# Altium PCB STM32F103ZET6.PCBDOC (part 3 of 4)
Units mil, origin at the board's own origin, x right, y up, seen from the top; angles counter-clockwise.
Board outline 4000 x 2280 mil, 2 copper layers (Top Layer, Bottom Layer); 80 components, 152 nets, 495 pads, 75 vias.
Unrouted connection lines stored in the file: 4.
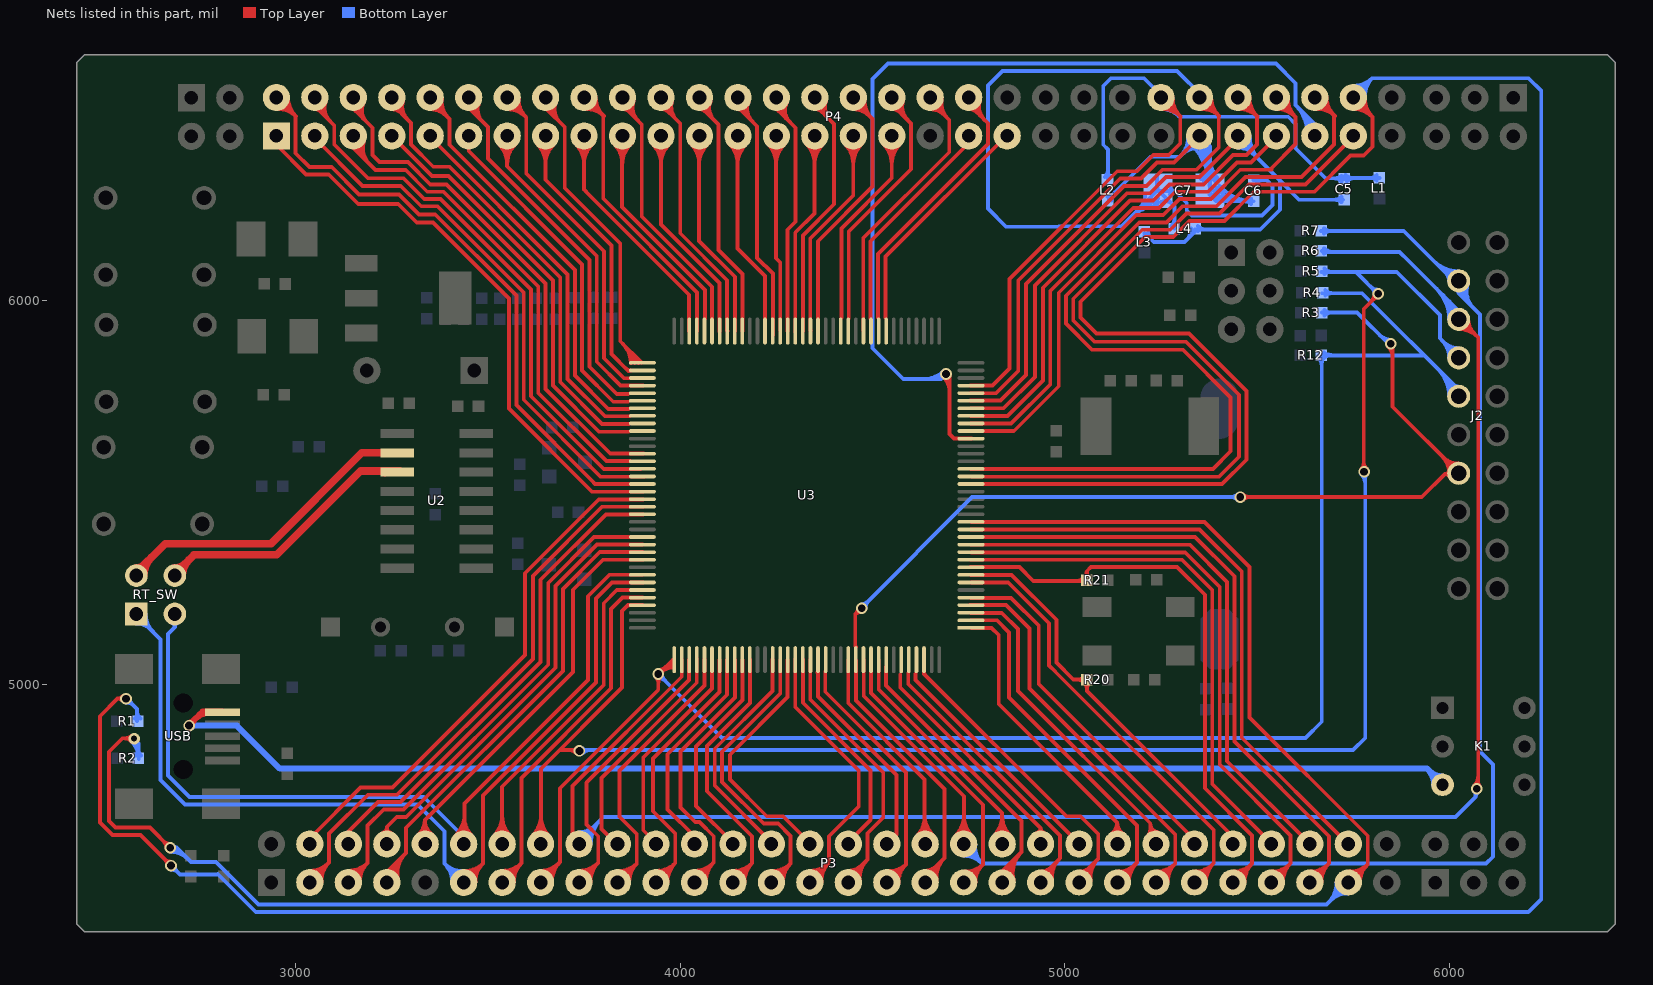
[diagram p3: the nets of this part, all layers, seen from the top]

## Via types
v1: diameter 30, hole 20, Top Layer to Bottom Layer, 68 vias
v2: diameter 125.98, hole 118.11, Top Layer to Bottom Layer, 4 vias
v3: diameter 23.62, hole 15.75, Top Layer to Bottom Layer, 2 vias
v4: diameter 30, hole 15, Top Layer to Bottom Layer, 1 vias

## Nets (pads, with @x,y where several pads share a name; then routed paths per layer and width w, separated by ;. In a path a pad name is that pad's centre, name@x,y a point inside that pad or via, vN(x,y) a via of type N, cw(c..) or ccw(c..) an arc to the next point about the centre after c; other vN are vias at no path point) (continued)
PA9: P3.12 RT_SW.3 U3.101 | length 2444.2
  Top Layer w10: P3.12@3415.48,4607.52 ccw(c3358.7,4664.3) 3439,4664.3 ; P3.12@3422.55,4600.45 ccw(c3382.84,4640.16) 3439,4640.16 ; P3.12@3439,4586 3439,4691.12 3760,5012.12 3760,5230 3816,5286 U3.101@3902,5286 ; 3439,4630.5 ccw(c3481.5,4630.5) P3.12@3451.45,4600.45 ; 3439,4654.64 ccw(c3505.64,4654.64) P3.12@3458.52,4607.52
  Bottom Layer w10: RT_SW.3@2678.26,5160.72 cw(c2674.7,5150) 2686,5150 ; RT_SW.3@2686,5184 2686,5150 ; RT_SW.3@2693.74,5160.72 ccw(c2697.3,5150) 2686,5150 ; P3.12@3437,4586 3437,4604 3333,4708 2723.87,4708 2667.84,4764.03 2667.84,5131.84 2686,5150
PA10: P3.11 RT_SW.1 U3.102 | length 2943.7
  Top Layer w10: P3.11@3435,4483 3487,4535 ; P3.11@3438.06,4506.41 ccw(c3440.31,4549.89) 3471.1,4519.1 ; P3.11@3438.57,4516.39 ccw(c3441.87,4580.12) 3487,4535 ; P3.11@3457.43,4486.36 cw(c3501.54,4487.15) 3470.35,4518.35 ; P3.11@3467.43,4486.54 cw(c3534.27,4487.73) 3487,4535 ; U3.102@3903,5266 3823,5266 3781,5224 3781,5006.19 3487,4712.19 3487,4535
  Bottom Layer w10: RT_SW.1@2585,5182 2648.84,5118.16 2648.84,4752.16 2712,4689 3317,4689 3387,4619 3387,4535 P3.11@3438,4484 ; RT_SW.1@2586,5159.47 cw(c2586,5107.5) 2622.75,5144.25 ; RT_SW.1@2586,5169.47 cw(c2586,5141.64) RT_SW.1@2605.68,5161.32 ; RT_SW.1@2600.53,5184 ccw(c2642.84,5184) 2612.92,5154.08 ; RT_SW.1@2610.53,5184 ccw(c2676.98,5184) 2629.99,5137.01 ; 3403.24,4518.76 ccw(c3433.27,4548.8) P3.11@3435.79,4506.4 ; 3403.99,4518.01 cw(c3373.56,4487.59) P3.11@3416.57,4486.51 ; P3.11@3406.58,4486.76 ccw(c3341.41,4488.4) 3387.5,4534.5 ccw(c3431.51,4578.5) P3.11@3435.2,4516.38
  Bottom Layer w20: RT_SW.1@2583,5171 RT_SW.1@2583,5182
PA11: P3.14 U3.103 | length 1044.3
  Top Layer w10: P3.14@3515.48,4607.52 ccw(c3463.53,4659.47) 3537,4659.47 ccw(c3610.47,4659.47) P3.14@3558.52,4607.52 ; P3.14@3522.55,4600.45 ccw(c3487.67,4635.33) 3537,4635.33 ccw(c3586.33,4635.33) P3.14@3551.45,4600.45 ; P3.14@3537,4587 3537,4735 3801,4999 3801,5212 3835,5246 U3.103@3904,5246
PA12: P3.13 U3.104 | length 1107.3
  Top Layer w10: P3.13@3535,4484 3587,4536 ; P3.13@3537.56,4506.43 ccw(c3538.8,4551.34) 3570.57,4519.57 ccw(c3602.34,4487.8) P3.13@3557.43,4486.56 ; P3.13@3537.84,4516.42 ccw(c3539.68,4583.32) 3587,4536 ; P3.13@3567.42,4486.84 cw(c3634.32,4488.68) 3587,4536 ; U3.104@3902,5227 3850,5227 3820,5197 3820,4991.02 3587,4758.02 3587,4536
PA13: J2.7 P3.16 R5.1 U3.105 | length 5267.9
  Top Layer w10: P3.16@3615.48,4607.52 ccw(c3561.11,4661.89) 3638,4661.89 ; P3.16@3622.55,4600.45 ccw(c3585.26,4637.74) 3638,4637.74 ; P3.16@3638,4586 3638,4781.75 3849,4992.75 3849,5192 3864,5207 U3.105@3902,5207 ; 3638,4632.92 ccw(c3683.92,4632.92) P3.16@3651.45,4600.45 ; 3638,4657.06 ccw(c3708.06,4657.06) P3.16@3658.52,4607.52 ; 3690,4830 v1@3740,4830 ; 3709.03,4830 cw(c3709.03,4799.03) v1@3730.93,4820.93 ; 3718.69,4830 ccw(c3718.69,4847.31) v1@3730.93,4835.07 ; 3859.26,5202.26 cw(c3871.31,5190.2) U3.105@3871.31,5207.25 ; 3860.34,5203.34 cw(c3869.94,5193.75) U3.105@3871.34,5207.25 ; v1@5770.93,5561.07 ccw(c5756.27,5575.73) 5777,5575.73 ; v1@5777,5551 5777,5977 v1@5815,6015 ; 5777,5580.56 ccw(c5804.56,5580.56) v1@5785.07,5561.07 ; 5796.51,5996.51 ccw(c5776.03,6017) v1@5805,6017 ; 5801.34,6001.34 cw(c5815,5987.69) v1@5815,6007
  Bottom Layer w10: P3.16@3635,4559 P3.16@3635,4589 ; v1@3741,4830 5749,4830 5781,4862 5781,5547 v1@5777,5551 ; v1@3745.07,4820.93 cw(c3766.97,4799.03) 3766.97,4830 ; v1@3745.07,4835.07 ccw(c3757.31,4847.31) 3757.31,4830 ; R5.1@5667,6073 5863,6073 5975,5961 5975,5901 J2.7@6025,5851 ; R5.1@5675.07,6067.93 cw(c5687.31,6055.69) 5687.31,6073 ; R5.1@5675.07,6082.07 ccw(c5696.97,6103.97) 5696.97,6073 ; 5757,6073 v1@5815,6015 ; v1@5770.93,5546.93 cw(c5746.62,5522.62) 5781,5522.62 ; 5781,5537.1 cw(c5794.9,5537.1) v1@5785.07,5546.93 ; 5794.51,6035.49 ccw(c5815,6055.97) v1@5815,6027 ; 5799.34,6030.66 cw(c5785.69,6017) v1@5805,6017 ; 5979.91,5896.09 cw(c5933.82,5850) J2.7@5999,5850 ; 5984.74,5891.26 ccw(c6024,5930.53) J2.7@6024,5875 ; 5996.98,5879.02 cw(c5967.96,5850) J2.7@6009,5850 ; 6001.81,5874.19 ccw(c6024,5896.38) J2.7@6024,5865 ; J2.7@6017,5850 J2.7@6026,5850
  other v1: 3738,4828 5778,5554 5815,6017
PA14: J2.9 P3.15 R4.1 R12.2 U3.109 | length 4970.1
  Top Layer w10: P3.15@3635,4487 3687,4539 ; P3.15@3637,4506.43 ccw(c3637,4548.52) 3666.76,4518.76 ; P3.15@3637,4516.43 ccw(c3637,4582.66) 3683.83,4535.83 ; P3.15@3657.4,4487.13 cw(c3704.61,4489.74) 3671.18,4523.18 ; P3.15@3667.39,4487.68 cw(c3734.59,4491.4) 3687,4539 ; v1@3935.93,5020.93 cw(c3918.86,5003.86) 3943,5003.86 cw(c3967.14,5003.86) v1@3950.07,5020.93 ; v1@3941,5031 v1@3943,5031 ; v1@3943,5027 3981,5065 U3.109@3984,5065 ; v1@3943,5029 3943,4986.87 3687,4730.87 3687,4539 ; v1@3943,5038 ccw(c3943,5064.56) 3961.78,5045.78 ; v1@3945.03,5029.03 cw(c3984.24,4989.81) U3.109@3984.24,5045.27 ; v1@3953,5028 cw(c3974.73,5028) 3959.36,5043.36 ; 3962.1,5046.1 cw(c3984.24,5023.96) U3.109@3984.24,5055.27 ; 3979.17,5063.17 cw(c3984.24,5058.1) U3.109@3984.24,5065.27
  Bottom Layer w10: v1@3943,5018 cw(c3943,4993.86) 3960.07,5010.93 cw(c3977.14,5028) v1@3953,5028 ; v1@3943.5,5027.5 4109,4862 5626,4862 5668,4904 R12.2@5668,5854 ; R12.2@5659.43,5849.99 cw(c5638.74,5829.3) 5668,5829.3 ; 5668,5836.54 cw(c5687.02,5836.54) 5673.57,5849.99 cw(c5688.07,5835.49) 5688.07,5856 ; R12.2@5668,5856 5932,5856 ; R4.1@5669,6018 5772.86,6018 6022,5768.86 J2.9@6022,5746 ; R12.2@5670,5858 5692,5858 ccw(c5692,5832.81) R12.2@5673.75,5850.17 ; R4.1@5677.07,6011.93 cw(c5691.73,5997.27) 5691.73,6018 ; R4.1@5677.07,6026.07 ccw(c5696.56,6045.56) 5696.56,6018 ; 5688.38,5858 cw(c5688.38,5878.95) 5673.57,5864.14 ccw(c5693.21,5883.77) 5693.21,5856 ; 5969.4,5821.47 cw(c5897.93,5750) J2.9@5999,5750 ; 5986.47,5804.4 cw(c5932.07,5750) J2.9@6009,5750 ; 6003.54,5787.33 cw(c5966.21,5750) J2.9@6019,5750 ; 6010.11,5780.75 ccw(c6024,5794.64) J2.9@6024,5775
  other v1: 3943,5028
PA15: J2.5 P3.18 R6.1 U3.110 | length 5363.3
  Top Layer w10: P3.18@3738,4585 3720,4603 3720,4737 4003.92,5020.92 U3.110@4003.92,5065.27 ; J2.5@6024,5925 cw(c6024,5854.99) 6073.51,5904.49 ; J2.5@6024,5935 cw(c6024,5889.13) 6056.44,5921.56 ; J2.5@6025,5951 6027,5951 6075,5903 v1@6075,4732 ; J2.5@6049,5950 ccw(c6099.7,5950) 6063.85,5914.15 ; v1@6063.93,4737.07 ccw(c6037.2,4763.8) 6075,4763.8 ; 6075,4744.49 ccw(c6085.49,4744.49) v1@6078.07,4737.07
  Bottom Layer w10: P3.18@3733,4589 3800,4656 6016,4656 6068,4708 v1@6068,4724 ; P3.18@3737,4606.43 ccw(c3737,4638.86) 3759.93,4615.93 ; P3.18@3737,4616.43 ccw(c3737,4673.01) 3777,4633 ; P3.18@3747.43,4586 cw(c3789.52,4586) 3759.76,4615.76 ; P3.18@3757.43,4586 cw(c3823.66,4586) 3776.83,4632.83 ; P3.18@3767.43,4586 cw(c3857.8,4586) 3793.9,4649.9 ; R6.1@5668,6128 5671,6125 5870,6125 5879,6116 5880,6116 6026,5970 J2.5@6026,5947 ; R6.1@5674.07,6120.93 cw(c5683.9,6111.1) 5683.9,6125 ; R6.1@5674.07,6135.07 ccw(c5698.38,6159.38) 5698.38,6125 ; 5965.77,6030.23 cw(c5885.53,5950) J2.5@5999,5950 ; 5982.84,6013.16 cw(c5919.67,5950) J2.5@6009,5950 ; 5999.91,5996.09 cw(c5953.82,5950) J2.5@6019,5950 ; v1@6063.93,4722.93 cw(c6054.1,4713.1) 6068,4713.1 ; 6068,4707.8 cw(c6083.46,4707.8) v1@6075.89,4721.28
  other v1: 6071,4730
PB0: P4.37 U3.46 | length 582.7
  Top Layer w10: U3.46@4495,5951.9 4495,6153.19 4750,6408.19 P4.37@4750,6429
PB1: P4.36 U3.47 | length 852.6
  Top Layer w10: U3.47@4476,5921 4476,6161.19 4699.5,6384.69 4699.5,6468.5 4650,6518 P4.36@4650,6527 ; P4.36@4650,6496.57 cw(c4650,6444.82) 4686.59,6481.41 ; P4.36@4670.09,6523.29 ccw(c4710.86,6515.77) 4681.55,6486.45 ; P4.36@4679.93,6521.48 ccw(c4733.57,6511.57) 4695,6473
PB3: J2.13 P3.35 R3.1 U3.133 | length 3726.9
  Top Layer w10: 4455.5,5183.5 cw(c4469.12,5169.88) v1@4471.02,5189.05 ; 4455.64,5183.64 ccw(c4440.27,5199) v1@4462,5199 ; U3.133@4457,5063 4457,4959 4687,4729 4687,4550 ; U3.133@4457,5098.74 4455,5100.74 4455,5184 4456,5184 v1@4471,5199 ; P3.35@4637,4486 4637,4500 4687,4550 ; P3.35@4637,4516.43 ccw(c4637,4556.11) 4665.05,4528.05 ; P3.35@4647.33,4487.48 cw(c4687.26,4493.21) 4658.73,4521.73 ; P3.35@4657.23,4488.9 cw(c4711.98,4496.75) 4672.87,4535.87 ; P3.35@4667.12,4490.32 cw(c4736.7,4500.3) 4687,4550 ; v1@5458,5488 5928,5488 5988,5548 ; v1@5463.07,5480.93 cw(c5480.14,5463.86) 5480.14,5488 cw(c5480.14,5512.14) v1@5463.07,5495.07 ; v1@5839.93,5879.93 cw(c5810.79,5850.79) 5852,5850.79 ; v1@5852,5882 5852,5723 J2.13@6027,5548 ; 5980.62,5594.38 cw(c5936.23,5550) J2.13@5999,5550 ; 5983.03,5591.97 ccw(c6024,5632.94) J2.13@6024,5575 ; 5997.69,5577.31 cw(c5970.37,5550) J2.13@6009,5550 ; J2.13@6000,5557 cw(c5988,5560.5) 5988,5548 ; 6000.1,5574.9 ccw(c6024,5598.8) J2.13@6024,5565 ; J2.13@6001.31,5539.49 ccw(c5988,5533.33) 5988,5548 ; J2.13@6024,5548 5988,5548
  Bottom Layer w10: v1@4471,5200 4759,5488 v1@5454,5488 ; v1@4472,5209 ccw(c4472,5228.31) 4485.66,5214.66 ; v1@4482,5199 cw(c4510.97,5199) 4490.49,5219.49 ; v1@5448.93,5480.93 ccw(c5431.86,5463.86) 5431.86,5488 ccw(c5431.86,5512.14) v1@5448.93,5495.07 ; R3.1@5668,5968 5760,5968 v1@5842,5886 ; R3.1@5675.07,5959.93 cw(c5694.56,5940.44) 5694.56,5968 ; R3.1@5675.07,5974.07 ccw(c5689.73,5988.73) 5689.73,5968 ; 5819.69,5908.31 ccw(c5847,5935.63) v1@5847,5897
  other v1: 4472,5199 5456,5488 5847,5887
PB4: J2.3 P3.38 R7.1 U3.134 | length 4740
  Top Layer w10: U3.134@4477,5066 4477,4971 4738,4710 P3.38@4738,4585 ; P3.38@4715.48,4607.52 ccw(c4661.11,4661.89) 4738,4661.89 ; P3.38@4722.55,4600.45 ccw(c4685.26,4637.74) 4738,4637.74 ; 4738,4632.92 ccw(c4783.92,4632.92) P3.38@4751.45,4600.45 ; 4738,4657.06 ccw(c4808.06,4657.06) P3.38@4758.52,4607.52
  Bottom Layer w10: P3.38@4735,4585 4785,4535 6095,4535 6113,4553 6113,4793 6081,4825 ; P3.38@4737.1,4565.57 cw(c4737.3,4524.21) 4766.54,4553.46 ; P3.38@4737.15,4555.57 cw(c4737.47,4490.47) 4783.5,4536.5 cw(c4823.53,4576.53) P3.38@4767.25,4582.69 ; P3.38@4757.31,4583.78 ccw(c4796.95,4579.44) 4768.75,4551.25 ; R7.1@5666,6180 5881,6180 6011,6050 J2.3@6024,6050 ; R7.1@5674.07,6172.93 cw(c5691.14,6155.86) 5691.14,6180 cw(c5691.14,6204.14) R7.1@5674.07,6187.07 ; 5959.13,6101.87 ccw(c6024,6166.74) J2.3@6024,6075 ; 5976.2,6084.8 ccw(c6024,6132.6) J2.3@6024,6065 ; 5990.51,6070.49 cw(c5970.03,6050) J2.3@5999,6050 ; 5993.27,6067.73 ccw(c6024,6098.46) J2.3@6024,6055 ; J2.3@6019.24,6051.54 ccw(c6054.74,6040.03) 6028.36,6013.64 ; J2.3@6025,6051 6025,6017 6079,5963 6079,4828 ; J2.3@6028.76,6048.46 ccw(c6072.18,6034.38) 6039.9,6002.1 ; J2.3@6038.27,6045.37 ccw(c6089.63,6028.73) 6051.45,5990.55 ; J2.3@6047.78,6042.29 ccw(c6107.07,6023.07) 6063,5979
PB5: P3.37 U3.135 | length 895
  Top Layer w10: U3.135@4496.05,5065.27 4496.05,4978.95 4787,4688 4787,4533 ; P3.37@4737,4483 4787,4533 ; P3.37@4739.6,4504.45 ccw(c4741.04,4546.4) 4770.72,4516.72 ; P3.37@4739.95,4514.45 ccw(c4742.12,4577.87) 4787,4533 ; P3.37@4757.43,4486 cw(c4799.52,4486) 4769.76,4515.76 ; P3.37@4767.43,4486 cw(c4833.66,4486) 4786.83,4532.83
PB6: P3.40 U3.136 | length 803.9
  Top Layer w10: U3.136@4516,5064 4516,4988 4837,4667 P3.40@4837,4586 ; P3.40@4815.48,4607.52 ccw(c4763.53,4659.47) 4837,4659.47 ccw(c4910.47,4659.47) P3.40@4858.52,4607.52 ; P3.40@4822.55,4600.45 ccw(c4787.67,4635.33) 4837,4635.33 ccw(c4886.33,4635.33) P3.40@4851.45,4600.45
PB7: P3.39 U3.137 | length 973.7
  Top Layer w10: U3.137@4535,5046 4535,4998 4887,4646 4887,4565 ; P3.39@4837,4486 4837,4515 4887,4565 ; P3.39@4837.48,4485.64 cw(c4880.35,4495.98) 4849.16,4527.16 ; P3.39@4847.2,4487.98 cw(c4900.67,4500.88) 4861.77,4539.77 ; P3.39@4856.92,4490.33 cw(c4920.99,4505.78) 4874.39,4552.39 ; P3.39@4866.64,4492.67 cw(c4941.31,4510.68) 4887,4565
PB8: P3.42 U3.139 | length 626.6
  Top Layer w10: 4572,5026.89 4572,4993 4937,4628 ; P3.42@4927.52,4614.92 ccw(c4923.24,4628) 4937,4628 ; P3.42@4937,4586 4937,4628 ; P3.42@4946.48,4614.92 cw(c4950.76,4628) 4937,4628
PB9: P3.41 U3.140 | length 905.7
  Top Layer w10: U3.140@4593,5030.56 4593,5002 4987,4608 4987,4549 ; P3.41@4937,4486 4937,4499 4987,4549 ; P3.41@4938.97,4514.46 ccw(c4938.97,4547.05) 4962.01,4524.01 ; P3.41@4947.35,4487.16 cw(c4986.54,4492.59) 4958.56,4520.56 ; P3.41@4957.26,4488.53 cw(c5011.51,4496.05) 4972.78,4534.78 ; P3.41@4967.16,4489.91 cw(c5036.48,4499.52) 4987,4549
PB10: P4.18 U3.69 | length 909.5
  Top Layer w10: P4.18@3749,6529 3751,6529 3800,6480 3800,6264 4044,6020 U3.69@4044,5920 ; P4.18@3751.58,6506.63 cw(c3755,6462.72) 3786.14,6493.86 ; P4.18@3752.36,6496.66 cw(c3757.21,6434.22) 3801.5,6478.5 ; P4.18@3770.43,6527 ccw(c3812.52,6527) 3782.76,6497.24 ; P4.18@3780.43,6527 ccw(c3846.66,6527) 3799.83,6480.17
PB11: P4.17 U3.70 | length 813
  Top Layer w10: P4.17@3728.48,6405.48 cw(c3676.53,6353.53) 3750,6353.53 cw(c3823.47,6353.53) P4.17@3771.52,6405.48 ; P4.17@3735.55,6412.55 cw(c3700.67,6377.67) 3750,6377.67 cw(c3799.33,6377.67) P4.17@3764.45,6412.55 ; P4.17@3750,6427 3750,6288 3755,6283 ; 3755,6282 4023,6014 U3.70@4023,5919
PB12: P4.16 U3.73 | length 1042.1
  Top Layer w10: P4.16@3650,6527 3650,6500 3699.84,6450.16 3699.84,6291.16 3844,6147 3844,5893 U3.73@3899,5838 ; P4.16@3659.44,6522.56 ccw(c3690.41,6507.99) 3666.21,6483.79 ; P4.16@3668.49,6518.3 ccw(c3704.1,6501.55) 3676.27,6473.73 ; P4.16@3677.54,6514.05 ccw(c3717.79,6495.12) 3686.34,6463.66 ; 3851.39,5885.61 cw(c3802.71,5836.92) U3.73@3871.56,5836.92 ; 3868.47,5868.53 cw(c3836.85,5836.92) U3.73@3881.56,5836.92 ; 3885.54,5851.46 cw(c3870.99,5836.92) U3.73@3891.56,5836.92
PB13: P4.15 U3.74 | length 909.8
  Top Layer w10: P4.15@3628.48,6405.48 cw(c3576.53,6353.53) 3650,6353.53 cw(c3723.47,6353.53) P4.15@3671.52,6405.48 ; P4.15@3635.55,6412.55 cw(c3600.67,6377.67) 3650,6377.67 cw(c3699.33,6377.67) P4.15@3664.45,6412.55 ; P4.15@3650,6427 3650,6313 3821,6142 3821,5860 3865,5816 U3.74@3867.97,5816 ; 3858.86,5822.14 ccw(c3871.31,5834.6) U3.74@3871.31,5816.98
PB14: P4.14 U3.75 | length 1087.7
  Top Layer w10: P4.14@3548,6530 3548,6527 3599.5,6475.5 3599.5,6329.5 3802,6127 3802,5849 3854,5797 U3.75@3903,5797 ; P4.14@3550.01,6506.57 cw(c3550.04,6462.16) 3581.44,6493.56 ; P4.14@3550.02,6496.57 cw(c3550.06,6428.06) 3598.5,6476.5 cw(c3642.64,6520.64) P4.14@3580.36,6524.92 ; P4.14@3570.38,6525.6 ccw(c3613.55,6522.64) 3582.96,6492.04
PB15: P4.13 U3.76 | length 1023.1
  Top Layer w10: P4.13@3528.48,6405.48 cw(c3476.53,6353.53) 3550,6353.53 cw(c3623.47,6353.53) P4.13@3571.52,6405.48 ; P4.13@3535.55,6412.55 cw(c3500.67,6377.67) 3550,6377.67 cw(c3599.33,6377.67) P4.13@3564.45,6412.55 ; P4.13@3550,6427 3550,6348 3783,6115 3783,5840 3845,5778 U3.76@3904,5778
PC0: P4.55 U3.26 | length 2810.1
  Top Layer w10: v1@4683.93,5800.93 cw(c4645.13,5762.13) 4700,5762.13 ; v1(4691,5808) cw(c4669.27,5786.27) 4700,5786.27 ; v1@4700,5806 4700,5652 4712,5640 U3.26@4758,5640
  Bottom Layer w10: 4635.47,5795 ccw(c4635.47,5863.53) v1@4683.93,5815.07 ; 4659.62,5795 ccw(c4659.62,5839.38) v1(4691,5808) 4678,5795 4579.87,5795 4500,5874.87 4500,6575 4540.03,6615.03 5548.97,6615.03 5600,6564 5600,6507 5653,6454 P4.55@5653,6425 ; 5600.49,6506.51 cw(c5529.57,6435.58) P4.55@5629.62,6428.45 ; 5615.98,6491.02 cw(c5558.49,6433.52) P4.55@5639.59,6427.74 ; 5631.47,6475.53 cw(c5587.4,6431.46) P4.55@5649.57,6427.03
PC1: P4.54 U3.27 | length 1631.9
  Top Layer w10: U3.27@4755,5660 4867,5660 4867.44,5660.44 4868.44,5660.44 4984,5776 4984,6019.39 5185.61,6221 5256,6221 5298,6263 5380,6263 5456,6339 5537,6339 5537,6343 5600,6406 5600,6476 P4.54@5549,6527 ; P4.54@5550,6518 P4.54@5550,6527 ; P4.54@5550.22,6506.57 cw(c5550.69,6461.34) 5582.68,6493.32 ; P4.54@5550.32,6496.57 cw(c5551.04,6428.05) 5599.5,6476.5 cw(c5645.75,6522.76) P4.54@5580.4,6525.65 ; P4.54@5570.41,6526.1 ccw(c5615,6524.12) 5583.44,6492.56
PC2: P4.53 U3.28 | length 1249.3
  Top Layer w10: U3.28@4755.89,5679.44 4860.44,5679.44 4962,5781 4962,6024.26 5177.74,6240 5245,6240 5287,6282 5372,6282 5448,6358 5484,6358 P4.53@5553,6427
PC3: P4.52 U3.29 | length 1527.9
  Top Layer w10: U3.29@4755.89,5699.12 4851.12,5699.12 4943,5791 4943,6032.13 5169.87,6259 5230,6259 5272,6301 5361,6301 5437,6377 5472,6377 5500,6405 5500,6478 P4.52@5451,6527 ; P4.52@5450.9,6506.59 cw(c5452.88,6462) 5484.44,6493.56 ; P4.52@5451,6502 P4.52@5451,6528 ; P4.52@5451.35,6496.6 cw(c5454.24,6431.25) 5500.5,6477.5 cw(c5548.95,6525.96) P4.52@5480.43,6526.68 ; P4.52@5470.43,6526.78 ccw(c5515.66,6526.31) 5483.68,6494.32
PC4: P4.39 U3.44 | length 605.1
  Top Layer w10: U3.44@4534,5954.07 4534,6113.19 4847.81,6427 P4.39@4850,6427
PC5: P4.38 U3.45 | length 867.2
  Top Layer w10: 4514,5955.26 4514,6120.19 4800,6406.19 4800,6460 4749,6511 P4.38@4749,6525 ; P4.38@4750,6496.57 cw(c4750,6464.14) 4772.93,6487.07 ; P4.38@4759.98,6523.96 ccw(c4790.53,6514.64) 4767.94,6492.06 ; P4.38@4769.54,6521.04 ccw(c4808.58,6509.13) 4779.72,6480.28 ; P4.38@4779.11,6518.12 ccw(c4826.63,6503.63) 4791.5,6468.5
PC6: P3.5 U3.96 | length 1505.6
  Top Layer w10: P3.5@3135,4485 3186.84,4536.84 ; P3.5@3137.12,4506.43 ccw(c3137.38,4552.42) 3169.9,4519.9 ; P3.5@3137.18,4516.43 ccw(c3137.58,4586.09) 3186.83,4536.83 ; P3.5@3157.42,4486.8 cw(c3202.75,4488.59) 3170.67,4520.67 ; P3.5@3167.41,4487.2 cw(c3233.86,4489.81) 3186.84,4536.84 ; U3.96@3903,5384 3776,5384 3657,5265 3657,5052.19 3280.81,4676 3229,4676 3186.84,4633.84 3186.84,4536.84
PC7: P3.8 U3.97 | length 1184.3
  Top Layer w10: P3.8@3226.26,4614.48 ccw(c3220.41,4630) 3237,4630 ; P3.8@3237,4584 3237,4630 ; P3.8@3239,4586 P3.8@3243,4586 ; P3.8@3247.74,4614.48 cw(c3253.59,4630) 3237,4630 ; U3.97@3902,5365 3783.87,5365 3676,5257.13 3676,5044.19 3287.81,4656 3263,4656 3237,4630
PC8: P3.7 U3.98 | length 1438.3
  Top Layer w10: P3.7@3236,4484 3236,4512 3287,4563 ; P3.7@3237.42,4486.1 cw(c3277.83,4495.24) 3248.53,4524.53 ; P3.7@3247.18,4488.3 cw(c3298.74,4499.97) 3261.36,4537.35 ; P3.7@3256.93,4490.51 cw(c3319.65,4504.71) 3274.18,4550.18 ; P3.7@3266.68,4492.72 cw(c3340.56,4509.44) 3287,4563 ; U3.98@3902,5345 3790.74,5345 3695,5249.26 3695,5036.19 3287,4628.19 3287,4563
PC9: P3.10 U3.99 | length 1185
  Top Layer w10: P3.10@3317.76,4609.58 ccw(c3286.42,4648) 3336,4648 ; P3.10@3324.08,4601.83 ccw(c3303.61,4626.93) 3336,4626.93 ; P3.10@3336,4582 3336,4648 ; 3336,4628.27 ccw(c3367.97,4628.27) P3.10@3349.08,4602.48 ; P3.10@3354.99,4610.55 cw(c3382.42,4648) 3336,4648 ; U3.99@3903,5325 3799,5325 3721,5247 3721,5033 3336,4648
PC10: P3.17 U3.111 | length 906.4
  Top Layer w10: P3.17@3735,4486 3787,4538 ; P3.17@3737,4506.43 ccw(c3737,4550.93) 3768.47,4519.47 ; P3.17@3737,4516.43 ccw(c3737,4585.08) 3785.54,4536.54 ; P3.17@3757.41,4486.94 cw(c3803.87,4489.1) 3770.98,4521.98 ; P3.17@3767.4,4487.41 cw(c3834.48,4490.51) 3787,4538 ; U3.111@4023,5064 4023,5012.44 3756,4745.44 3756,4637 3787,4606 3787,4538
PC11: P3.20 U3.112 | length 603.4
  Top Layer w10: P3.20@3836,4585 3834.87,4585 3795,4624.87 3795,4757.19 4043,5005.19 U3.112@4043,5068
PC12: P3.19 U3.113 | length 891.6
  Top Layer w10: P3.19@3836,4484 3887,4535 ; P3.19@3838.06,4506.41 ccw(c3840.31,4549.89) 3871.1,4519.1 ; P3.19@3838.57,4516.39 ccw(c3841.87,4580.12) 3887,4535 ; P3.19@3857.43,4486.36 cw(c3901.54,4487.15) 3870.35,4518.35 ; P3.19@3867.43,4486.54 cw(c3934.27,4487.73) 3887,4535 ; U3.113@4062.98,5065.27 4062.98,4998.17 3842,4777.19 3842,4657 3887,4612 3887,4535
PC13: P3.49 U3.7 | length 1287.4
  Top Layer w10: U3.7@4757,5266 4853,5266 4959,5160 4959,5050 4974,5035 ; 4975.13,5034 5387,4622.13 5387,4603 ; P3.49@5336,4485 5387,4536 ; P3.49@5338.97,4504.46 ccw(c5338.97,4544.29) 5367.13,4516.13 ; P3.49@5338.97,4514.46 ccw(c5338.97,4578.43) 5384.2,4533.2 ; P3.49@5357.43,4486.52 cw(c5402.39,4487.78) 5370.58,4519.58 ; P3.49@5367.42,4486.8 cw(c5434.32,4488.67) 5387,4536 ; 5387,4600 5387,4536
PC14: P3.52 R20.2 U3.8 | length 1142.4
  Top Layer w10: U3.8@4755.89,5285.74 4861.26,5285.74 4978,5169 4978,5058 5022,5014 R20.2@5060,5014 ; 5031.1,5014 cw(c5031.1,4986.66) 5050.43,5005.99 cw(c5032.15,4987.71) 5058,4987.71 ; 5035.62,5014 ccw(c5035.62,5034.95) R20.2@5050.43,5020.14 ; 5058,4990.13 cw(c5080.43,4990.13) R20.2@5064.57,5005.99 ; R20.2@5058,5013 5058,4984 5439,4603 P3.52@5439,4586
PC15: P3.51 R21.2 U3.9 | length 1747.8
  Top Layer w10: U3.9@4755,5306 4882,5306 4918,5270 R21.2@5057,5270 ; 5028.37,5270 ccw(c5028.37,5301.19) 5050.43,5279.14 ccw(c5034.57,5295) 5057,5295 ; 5038.34,5270 cw(c5038.34,5252.9) R21.2@5050.43,5264.99 ; R21.2@5057,5275 5057,5295 ; R21.2@5064.03,5279.63 cw(c5077.3,5295) 5057,5295 ; P3.51@5436,4484 5487,4535 ; P3.51@5438.97,4504.46 ccw(c5438.97,4546.7) 5468.84,4516.84 ; P3.51@5438.97,4514.46 ccw(c5438.97,4580.85) 5485.91,4533.91 ; P3.51@5457.43,4486.33 cw(c5501.57,4487.13) 5470.35,4518.35 ; P3.51@5467.43,4486.52 cw(c5534.27,4487.73) 5487,4535 ; 5057,5295 5068,5306 5292,5306 5364,5234 5364,4731 5487,4608 5487,4535
PD0: P3.22 U3.114 | length 566.8
  Top Layer w10: P3.22@3939,4586.87 3904,4621.87 3904,4811 4083,4990 U3.114@4083,5065
PD1: P3.21 U3.115 | length 880.1
  Top Layer w10: P3.21@3935,4484 3987,4536 ; P3.21@3937.56,4506.43 ccw(c3938.8,4551.34) 3970.57,4519.57 ccw(c4002.34,4487.8) P3.21@3957.43,4486.56 ; P3.21@3937.84,4516.42 ccw(c3939.68,4583.32) 3987,4536 ; P3.21@3967.42,4486.84 cw(c4034.32,4488.68) 3987,4536 ; U3.115@4102,5065 4102,4981.19 3929,4808.19 3929,4671 3987,4613 3987,4536
PD2: P3.24 U3.116 | length 569.7
  Top Layer w10: P3.24@4038,4588.87 4038,4605 3967,4676 3967,4819.19 4122,4974.19 U3.116@4122,5065
PD3: P3.23 U3.117 | length 883
  Top Layer w10: P3.23@4036,4487 4087,4538 ; P3.23@4037,4506.43 ccw(c4037,4550.93) 4068.47,4519.47 ; P3.23@4037,4516.43 ccw(c4037,4585.08) 4085.54,4536.54 ; P3.23@4057.41,4486.94 cw(c4103.87,4489.1) 4070.98,4521.98 ; P3.23@4067.4,4487.41 cw(c4134.48,4490.51) 4087,4538 ; U3.117@4142,5065 4142,4967.19 4001,4826.19 4001,4681 4039,4643 4050,4643 4087,4606 4087,4538
PD4: P3.26 U3.118 | length 568.7
  Top Layer w10: P3.26@4139,4587 4041,4685 4041,4839.19 4162,4960.19 U3.118@4162,5065
PD5: P3.25 U3.119 | length 876.3
  Top Layer w10: P3.25@4137,4486 4187,4536 ; P3.25@4137.56,4506.43 ccw(c4138.8,4551.34) 4170.57,4519.57 ccw(c4202.34,4487.8) P3.25@4157.43,4486.56 ; P3.25@4137.84,4516.42 ccw(c4139.68,4583.32) 4187,4536 ; P3.25@4167.42,4486.84 cw(c4234.32,4488.68) 4187,4536 ; U3.119@4181.09,5065.27 4181.09,4952.28 4070,4841.19 4070,4723.12 4187,4606.12 4187,4536
PD6: P3.28 U3.122 | length 600.6
  Top Layer w10: P3.28@4239,4588.87 4089.69,4738.18 4089.69,4833.69 4240.14,4984.14 U3.122@4240.14,5065.27
PD7: P3.27 U3.123 | length 939.8
  Top Layer w10: P3.27@4236,4484 4287,4535 ; P3.27@4238.06,4506.41 ccw(c4240.31,4549.89) 4271.1,4519.1 ; P3.27@4238.57,4516.39 ccw(c4241.87,4580.12) 4287,4535 ; P3.27@4257.43,4486.36 cw(c4301.54,4487.15) 4270.35,4518.35 ; U3.123@4260,5065 4260,4977 4108.84,4825.84 4108.84,4747.16 4217,4639 4255,4639 4287,4607 4287,4535 ; P3.27@4267.43,4486.54 cw(c4334.27,4487.73) 4287,4535
PD8: P4.12 U3.77 | length 1108.2
  Top Layer w10: P4.12@3448,6530 3448,6502 3499.75,6450.25 3499.75,6368.25 3764,6104 3764,5827 3835,5756 3864.59,5756 ; P4.12@3459.43,6522.54 ccw(c3490.29,6507.97) 3466.16,6483.84 ; P4.12@3468.48,6518.27 ccw(c3503.93,6501.52) 3476.2,6473.8 ; P4.12@3477.52,6514 ccw(c3517.57,6495.08) 3486.25,6463.75
PD9: P4.11 U3.78 | length 884.6
  Top Layer w10: P4.11@3450,6427 3450,6388 3745,6093 3745,5817 3826,5736 3863.82,5736
PD10: P4.10 U3.79 | length 1223.1
  Top Layer w10: P4.10@3348,6528 3348,6523 3400,6471 3400,6404 3726,6078 3726,5804 3813,5717 3865.65,5717 ; P4.10@3350,6496.57 cw(c3350,6437.58) 3391.71,6479.29 ; P4.10@3350,6506.57 cw(c3350,6471.72) 3374.64,6496.36 ; P4.10@3370.27,6524.42 ccw(c3413.13,6518.97) 3382.58,6488.42 ; P4.10@3380.19,6523.16 ccw(c3438.71,6515.72) 3397,6474
PD11: P4.9 U3.80 | length 981.7
  Top Layer w10: P4.9@3350,6427 3350,6424 3707,6067 3707,5795 3804,5698 U3.80@3868.65,5698
PD12: P4.8 U3.81 | length 1336.2
  Top Layer w10: P4.8@3249,6525 3249,6512 3300,6461 3300,6405 3358,6347 3400.13,6347 3688,6059.13 3688,5787 3797,5678 U3.81@3866.99,5678 ; P4.8@3250,6496.57 cw(c3250,6461.72) 3274.64,6486.36 ; P4.8@3250,6526 P4.8@3259,6526 ; P4.8@3260.02,6524.1 ccw(c3290.41,6515.32) 3268.05,6492.95 ; P4.8@3269.63,6521.33 ccw(c3309,6509.95) 3280.02,6480.98 ; P4.8@3279.24,6518.55 ccw(c3327.58,6504.58) 3292,6469
PD13: P4.7 U3.82 | length 1094.4
  Top Layer w10: P4.7@3250,6427 3251,6427 3355,6323 3397.26,6323 3669,6051.26 3669,5778 3789,5658 3865.83,5658
PD14: P4.6 U3.85 | length 1540.8
  Top Layer w10: P4.6@3150,6525 3150,6498 3199.84,6448.16 3199.84,6377.16 3218,6359 3292.13,6359 3350.13,6301 3392.39,6301 3650,6043.39 3650,5769 3818,5601 U3.85@3905,5601 ; P4.6@3150.39,6526.81 ccw(c3177.26,6513.28) 3155.99,6492.01 ; P4.6@3159.32,6522.31 ccw(c3190.27,6506.73) 3165.77,6482.23 ; P4.6@3168.25,6517.81 ccw(c3203.29,6500.18) 3175.55,6472.45 ; P4.6@3177.18,6513.32 ccw(c3216.3,6493.63) 3185.34,6462.66
PD15: P4.5 U3.86 | length 1473.2
  Top Layer w10: P4.5@3150,6427 3150,6396 3208,6338 3286.26,6338 3342.26,6282 3384.52,6282 3631,6035.52 3631,5759 3808,5582 U3.86@3869.94,5582 ; P4.5@3150.41,6426.85 ccw(c3186.26,6413.73) 3159.26,6386.74 ; P4.5@3159.8,6423.41 ccw(c3202.48,6407.8) 3170.34,6375.66 ; P4.5@3169.19,6419.98 ccw(c3218.7,6401.86) 3181.42,6364.58 ; P4.5@3178.58,6416.54 ccw(c3234.92,6395.92) 3192.5,6353.5
PE0: P3.44 U3.141 | length 619.8
  Top Layer w10: 4612,5028.36 4612,5012 5038,4586 P3.44@5039,4586
PE1: P3.43 U3.142 | length 995.4
  Top Layer w10: U3.142@4633.59,5035.02 ccw(c4649.88,5035.02) 4638.36,5023.5 ; U3.142@4633.84,5065.27 4633.84,5028.02 5003.86,4658 5041,4658 5085,4614 ; P3.43@5037,4486 5037,4498 5087,4548 ; P3.43@5038.97,4514.46 ccw(c5038.97,4549.46) 5063.71,4524.71 ; P3.43@5047.36,4487.1 cw(c5085.5,4492.1) 5058.3,4519.3 ; P3.43@5057.28,4488.4 cw(c5110.87,4495.43) 5072.65,4533.65 ; P3.43@5067.19,4489.7 cw(c5136.24,4498.75) 5087,4548 ; 5087,4612 5087,4548
PE2: P3.46 U3.1 | length 865.3
  Top Layer w10: U3.1@4757,5148 4809,5148 4828,5129 4828,4950 5136,4642 ; P3.46@5119.74,4611.07 ccw(c5098.45,4642) 5136,4642 ; P3.46@5125.41,4602.83 ccw(c5111.55,4622.97) 5136,4622.97 ; P3.46@5136,4591 5136,4642 ; 5136,4624.18 ccw(c5160.3,4624.18) P3.46@5147.64,4603.44 ; P3.46@5152.85,4611.98 cw(c5171.16,4642) 5136,4642
PE3: P3.45 U3.2 | length 1094.7
  Top Layer w10: U3.2@4755.89,5167.63 4823.37,5167.63 4855,5136 4855,4967 5187.5,4634.5 5187.5,4537.5 ; P3.45@5135,4485 5187.5,4537.5 ; P3.45@5138.97,4504.46 ccw(c5138.97,4541.88) 5165.42,4515.42 ; P3.45@5138.97,4514.46 ccw(c5138.97,4576.02) 5182.49,4532.49 ; P3.45@5157.42,4486.56 cw(c5204.28,4487.98) 5171.13,4521.13 ; P3.45@5167.42,4486.86 cw(c5236.05,4488.95) 5187.5,4537.5
PE4: P3.48 U3.3 | length 928.5
  Top Layer w10: U3.3@4756,5187 4836,5187 4878,5145 4878,4984 5222,4640 ; P3.48@5215.48,4607.52 ccw(c5199.74,4623.26) 5222,4623.26 ; 5222,4628.11 ccw(c5244.31,4628.11) P3.48@5240.49,4606.13 ; P3.48@5236,4587 5222,4601 5222,4640 ; P3.48@5242.2,4615.98 cw(c5246.37,4640) 5222,4640
PE5: P3.47 U3.4 | length 1192.1
  Top Layer w10: U3.4@4753,5207 4847,5207 4908,5146 4908,4990 5287,4611 5287,4535 ; P3.47@5238,4486 5287,4535 ; P3.47@5238.97,4504.46 ccw(c5238.97,4546.7) 5268.84,4516.84 ; P3.47@5238.97,4514.46 ccw(c5238.97,4580.85) 5285.91,4533.91 ; P3.47@5257.43,4486.33 cw(c5301.57,4487.13) 5270.35,4518.35 ; P3.47@5267.43,4486.52 cw(c5334.27,4487.73) 5287,4535
PE6: P3.50 U3.5 | length 948.7
  Top Layer w10: U3.5@4756,5226 4860,5226 4932,5154 4932,5002 5337,4597 P3.50@5337,4586 ; P3.50@5336,4587 P3.50@5336,4594.13
PE7: P4.27 U3.58 | length 705.5
  Top Layer w10: P4.27@4228.48,6405.48 cw(c4178.94,6355.94) 4249,6355.94 ; P4.27@4235.55,6412.55 cw(c4203.08,6380.08) 4249,6380.08 ; 4249,6351.11 cw(c4325.89,6351.11) P4.27@4271.52,6405.48 ; 4249,6375.26 cw(c4301.74,6375.26) P4.27@4264.45,6412.55 ; P4.27@4249,6429 4249,6109 4260,6098 U3.58@4260,5921
PE8: P4.26 U3.59 | length 808.6
  Top Layer w10: P4.26@4150,6496.57 cw(c4150,6483.45) 4159.27,6492.73 ; P4.26@4150,6527 4150,6502 4200,6452 4200,6109.87 4241,6068.87 U3.59@4241,5909 ; P4.26@4159.57,6522.85 ccw(c4190.74,6509.32) 4166.71,6485.29 ; P4.26@4168.74,6518.86 ccw(c4205.24,6503.02) 4177.11,6474.89 ; P4.26@4177.92,6514.88 ccw(c4219.73,6496.73) 4187.5,6464.5
PE9: P4.25 U3.60 | length 732.3
  Top Layer w10: P4.25@4128.48,6405.48 cw(c4078.94,6355.94) 4149,6355.94 ; P4.25@4135.55,6412.55 cw(c4103.08,6380.08) 4149,6380.08 ; 4149,6351.11 cw(c4225.89,6351.11) P4.25@4171.52,6405.48 ; 4149,6375.26 cw(c4201.74,6375.26) P4.25@4164.45,6412.55 ; P4.25@4149,6429 4149,6134 4220,6063 U3.60@4220,5919
PE10: P4.24 U3.63 | length 809.2
  Top Layer w10: P4.24@4049,6527 4049,6507 4099.75,6456.25 4099.75,6130.12 4162,6067.87 U3.63@4162,5919 ; P4.24@4050,6496.57 cw(c4050,6473.79) 4066.1,6489.9 ; P4.24@4059.77,6523.34 ccw(c4090.41,6511.86) 4067.28,6488.72 ; P4.24@4069.13,6519.83 ccw(c4106.4,6505.88) 4078.26,6477.74 ; P4.24@4078.5,6516.33 ccw(c4122.39,6499.89) 4089.25,6466.75
PE11: P4.23 U3.64 | length 737.4
  Top Layer w10: P4.23@4028.48,6405.48 cw(c3978.94,6355.94) 4049,6355.94 ; P4.23@4035.55,6412.55 cw(c4003.08,6380.08) 4049,6380.08 ; 4049,6351.11 cw(c4125.89,6351.11) P4.23@4071.52,6405.48 ; 4049,6375.26 cw(c4101.74,6375.26) P4.23@4064.45,6412.55 ; P4.23@4049,6425 4049,6154 4142,6061 U3.64@4142,5919
PE12: P4.22 U3.65 | length 835.8
  Top Layer w10: P4.22@3950,6496.57 cw(c3950,6466.55) 3971.22,6487.78 ; P4.22@3950,6527 3950,6509 4000,6459 4000,6173.87 4122,6051.87 4122,5921 U3.65@4122.97,5920.03 ; P4.22@3959.93,6523.81 ccw(c3990.62,6513.96) 3967.83,6491.17 ; P4.22@3969.45,6520.75 ccw(c4008.15,6508.33) 3979.41,6479.59 ; P4.22@3978.98,6517.7 ccw(c4025.69,6502.7) 3991,6468
PE13: P4.21 U3.66 | length 764.9
  Top Layer w10: P4.21@3928.48,6405.48 cw(c3876.53,6353.53) 3950,6353.53 cw(c4023.47,6353.53) P4.21@3971.52,6405.48 ; P4.21@3935.55,6412.55 cw(c3900.67,6377.67) 3950,6377.67 cw(c3999.33,6377.67) P4.21@3964.45,6412.55 ; P4.21@3950,6427 3950,6197 4102,6045 U3.66@4102,5918
PE14: P4.20 U3.67 | length 862.3
  Top Layer w10: P4.20@3848,6528 3848,6509 3900,6457 3900,6217.74 4083,6034.74 U3.67@4083,5919 ; P4.20@3850,6496.57 cw(c3850,6471.38) 3867.81,6489.19 ; P4.20@3859.84,6523.52 ccw(c3890.74,6512.61) 3867.56,6489.44 ; P4.20@3869.27,6520.19 ccw(c3907.32,6506.75) 3878.78,6478.22 ; P4.20@3878.7,6516.86 ccw(c3923.89,6500.9) 3890,6467
PE15: P4.19 U3.68 | length 757.2
  Top Layer w10: P4.19@3828.48,6405.48 cw(c3778.94,6355.94) 3849,6355.94 ; P4.19@3835.55,6412.55 cw(c3803.08,6380.08) 3849,6380.08 ; 3849,6351.11 cw(c3925.89,6351.11) P4.19@3871.52,6405.48 ; 3849,6375.26 cw(c3901.74,6375.26) P4.19@3864.45,6412.55 ; P4.19@3849,6427 3849,6242 3850,6241 ; 3850,6240.87 4064,6026.87 U3.68@4064,5951.66
PF0: P3.54 U3.10 | length 1380.3
  Top Layer w10: U3.10@4755,5325 5305,5325 5383.12,5246.88 5383.12,4741.88 P3.54@5535,4590
PF1: P3.53 U3.11 | length 1722.1
  Top Layer w10: U3.11@4757,5344 5312.93,5344 5402.7,5254.23 5402.7,4792.3 5587,4608 5587,4536 ; P3.53@5536,4485 5587,4536 ; P3.53@5538.97,4504.46 ccw(c5538.97,4544.29) 5567.13,4516.13 ; P3.53@5538.97,4514.46 ccw(c5538.97,4578.43) 5584.2,4533.2 ; P3.53@5557.43,4486.52 cw(c5602.39,4487.78) 5570.58,4519.58 ; P3.53@5567.42,4486.8 cw(c5634.32,4488.67) 5587,4536
PF2: P3.56 U3.12 | length 1476.2
  Top Layer w10: U3.12@4756,5364 5325,5364 5421.84,5267.16 5421.84,4801.16 P3.56@5637,4586
PF3: P3.55 U3.13 | length 1818.6
  Top Layer w10: U3.13@4755.89,5384.16 5338.84,5384.16 5440.84,5282.16 5440.84,4852.16 5687,4606 5687,4536 ; P3.55@5637,4486 5687,4536 ; P3.55@5638.97,4504.46 ccw(c5638.97,4544.29) 5667.13,4516.13 ; P3.55@5638.97,4514.46 ccw(c5638.97,4578.43) 5684.2,4533.2 ; P3.55@5657.43,4486.52 cw(c5702.39,4487.78) 5670.58,4519.58 ; P3.55@5667.42,4486.8 cw(c5734.32,4488.67) 5687,4536
PF4: P3.58 U3.14 | length 1571.9
  Top Layer w10: U3.14@4755.89,5403.85 5350.15,5403.85 5459.84,5294.16 5459.84,4862.16 P3.58@5736,4586
PF5: P3.57 R2.2 U3.15 | length 6088.6
  Top Layer w10: 2553.44,4861 cw(c2553.44,4833.44) v4@2572.93,4852.93 ; 2558.27,4861 ccw(c2558.27,4881.73) v4@2572.93,4867.07 ; v4@2580,4861 2550,4861 2515,4826 2515,4646 2532,4629 2621,4629 v1(2674,4576) ; v1@2664,4576 ccw(c2639.86,4576) 2656.93,4593.07 ccw(c2674,4610.14) v1@2674,4586 ; U3.15@4757,5423 5363,5423 5480,5306 5480,4915 5787.5,4607.5 5787.5,4533.5 ; P3.57@5737,4483 5787.5,4533.5 ; P3.57@5739.46,4504.46 ccw(c5740.61,4547.49) 5771.05,4517.05 ; P3.57@5739.73,4514.45 ccw(c5741.47,4579.53) 5787.5,4533.5 ; P3.57@5757.43,4486 cw(c5799.52,4486) 5769.76,4515.76 ; P3.57@5767.43,4486 cw(c5833.66,4486) 5786.83,4532.83
  Bottom Layer w10: v4@2572.93,4852.93 cw(c2526.89,4806.89) R2.2@2592,4806.89 ; R2.2@2583.43,4816.14 ccw(c2562.74,4836.83) 2592,4836.83 ; R2.2@2592,4807 2592,4848 v4(2580,4860) cw(c2551.03,4831.03) 2592,4831.03 ; 2592,4829.58 ccw(c2611.02,4829.58) R2.2@2597.57,4816.14 ; v1@2674,4566 cw(c2674,4500.5) 2720.31,4546.82 ; v1@2680.4,4568.32 cw(c2689.56,4557.31) 2699.69,4567.44 ; v1@2682.71,4571.08 cw(c2691.13,4566.33) 2691.13,4576 ; v1@2682.71,4580.92 ccw(c2691.13,4585.67) 2691.13,4576 ; 2691.95,4575.18 ccw(c2682.53,4565.76) v1(2674,4576) ; 2703.24,4563.89 ccw(c2674,4534.64) v1(2674,4576) ; 2792,4539 2728.13,4539 2691.13,4576 ; 2793.31,4539 2903.31,4429 5681,4429 P3.57@5738,4486 ; 5684.34,4432.34 ccw(c5630.68,4486) P3.57@5706.57,4486 ; 5691.51,4439.51 cw(c5735.03,4395.98) P3.57@5735.03,4457.54 ; 5701.41,4449.41 ccw(c5664.82,4486) P3.57@5716.57,4486 ; 5708.58,4456.58 cw(c5735.03,4430.12) P3.57@5735.03,4467.54 ; v1(2674,4576) 2691.13,4576
PF8: P4.58 R1.2 U3.20 | length 10012.4
  Top Layer w10: v1@2551.47,4957.42 ccw(c2537,4944.8) 2537,4964 ; v1@2551.47,4970.58 cw(c2537,4983.2) 2537,4964 ; v1(2559,4964) 2537,4964 ; v1@2666,4530 ccw(c2641.86,4530) 2658.93,4547.07 ccw(c2676,4564.14) v1@2676,4540 ; v1(2676,4530) 2597,4609 2524,4609 2491,4642 2491,4918 2537,4964 ; U3.20@4755,5522 5409,5522 5472,5585 5472,5764 5323,5913 5082.74,5913 5041,5954.74 5041,5995.78 5209.22,6164 5282,6164 5324,6206 5415,6206 5491,6282 5649,6282 5743,6376 5777,6376 5800,6399 5800,6476 P4.58@5751,6525 ; P4.58@5750.22,6506.57 cw(c5750.69,6461.34) 5782.68,6493.32 ; P4.58@5750.32,6496.57 cw(c5751.04,6428.05) 5799.5,6476.5 cw(c5845.75,6522.76) P4.58@5780.4,6525.65 ; P4.58@5770.41,6526.1 ccw(c5815,6524.12) 5783.44,6492.56
  Bottom Layer w10: v1@2559,4954 cw(c2559,4925.03) 2579.49,4945.51 ; v1(2559,4964) 2560,4965 2588,4937 R1.2@2588,4906 ; v1@2569,4964 ccw(c2588.31,4964) 2574.66,4950.34 ; R1.2@2582.43,4912.14 ccw(c2568.98,4925.58) 2588,4925.58 ; 2588,4932.83 ccw(c2617.26,4932.83) R1.2@2596.57,4912.14 ; v1@2676,4520 cw(c2676,4495.86) 2693.07,4512.93 cw(c2710.14,4530) v1@2686,4530 ; v1(2676,4530) 2699,4507 2798,4507 ; 2797.44,4508 2896.72,4408.72 ; 2897,4409.03 6205.03,4409.03 6238.84,4442.84 6238.84,6544.03 6205.84,6577.03 5797.97,6577.03 ; P4.58@5749,6527 5799,6577 ; P4.58@5750.36,6547.43 ccw(c5751.15,6591.54) 5782.35,6560.35 ; P4.58@5750.54,6557.43 ccw(c5751.73,6624.27) 5799,6577 ; P4.58@5770.41,6528.06 cw(c5813.89,6530.31) 5783.1,6561.1 ; P4.58@5780.39,6528.57 cw(c5844.12,6531.87) 5799,6577 ; 5800,6577 5799,6577
PF9: P4.57 U3.21 | length 2358.2
  Top Layer w10: U3.21@4757,5541 5401,5541 5453,5593 5453,5754 5315,5892 5076.87,5892 5022,5946.87 5022,6003.65 5201.35,6183 5274,6183 5316,6225 5402,6225 5478,6301 5626,6301 P4.57@5756,6431 ; P4.57@5750,6425 P4.57@5750,6426
PF10: P4.56 U3.22 | length 2593
  Top Layer w10: U3.22@4755.89,5561.33 5385.14,5561.33 5431,5607.19 5431,5747 5307,5871 5071,5871 5003,5939 5003,6011.52 5193.48,6202 5264,6202 5306,6244 5394,6244 5470,6320 5615,6320 5700,6405 5700,6481 P4.56@5651,6530 ; P4.56@5651.92,6506.66 cw(c5656.03,6463.09) 5686.97,6494.03 ; P4.56@5652.86,6496.7 cw(c5658.62,6435.62) 5702,6479 ; P4.56@5670.43,6527 ccw(c5710.11,6527) 5682.05,6498.95 ; P4.56@5680.43,6527 ccw(c5744.25,6527) 5699.12,6481.88
PF11: P4.34 U3.49 | length 824.1
  Top Layer w10: U3.49@4438,5951.49 4438,6178.19 4600.25,6340.44 4600.25,6459.75 4548,6512 P4.34@4548,6528 ; P4.34@4550,6496.57 cw(c4550,6464.14) 4572.93,6487.07 ; P4.34@4559.99,6524 ccw(c4590.88,6514.73) 4568.08,6491.92 ; P4.34@4569.57,6521.12 ccw(c4609.09,6509.26) 4579.91,6480.09 ; P4.34@4579.15,6518.25 ccw(c4627.29,6503.8) 4591.75,6468.25
PF12: P4.33 U3.50 | length 719
  Top Layer w10: 4419,5955.12 4419,6186.19 4550,6317.19 P4.33@4550,6427 ; P4.33@4528.48,6405.48 cw(c4476.53,6353.53) 4550,6353.53 cw(c4623.47,6353.53) P4.33@4571.52,6405.48 ; P4.33@4535.55,6412.55 cw(c4500.67,6377.67) 4550,6377.67 cw(c4599.33,6377.67) P4.33@4564.45,6412.55
PF13: P4.32 U3.53 | length 866.8
  Top Layer w10: U3.53@4358,5924 4358,6153.19 4500.25,6295.44 4500.25,6470.75 4449,6522 P4.32@4449,6529 ; P4.32@4450,6496.57 cw(c4450,6437.58) 4491.71,6479.29 ; P4.32@4450,6506.57 cw(c4450,6471.72) 4474.64,6496.36 ; P4.32@4451,6515 P4.32@4451,6529 ; P4.32@4470.28,6524.5 ccw(c4513.67,6519.16) 4482.76,6488.24 ; P4.32@4480.2,6523.28 ccw(c4539.47,6515.98) 4497.25,6473.75
PF14: P4.31 U3.54 | length 743.7
  Top Layer w10: U3.54@4339,5921 4338,5922 4338,6160.19 4450,6272.19 P4.31@4450,6425 ; P4.31@4428.48,6405.48 cw(c4376.53,6353.53) 4450,6353.53 cw(c4523.47,6353.53) P4.31@4471.52,6405.48 ; P4.31@4435.55,6412.55 cw(c4400.67,6377.67) 4450,6377.67 cw(c4499.33,6377.67) P4.31@4464.45,6412.55
PF15: P4.30 U3.55 | length 820.9
  Top Layer w10: U3.55@4319,5920 4319,6168.19 4400,6249.19 4400,6458 4350,6508 P4.30@4350,6530 ; P4.30@4350,6496.57 cw(c4350,6468.97) 4369.52,6488.48 ; P4.30@4359.89,6523.67 ccw(c4390.69,6513.28) 4367.7,6490.3 ; P4.30@4369.36,6520.47 ccw(c4407.74,6507.53) 4379.1,6478.9 ; P4.30@4378.84,6517.28 ccw(c4424.78,6501.79) 4390.5,6467.5
PG0: P4.29 U3.56 | length 721.6
  Top Layer w10: U3.56@4299,5917 4299,6175.44 4349,6225.44 P4.29@4349,6425 ; P4.29@4328.48,6405.48 cw(c4278.94,6355.94) 4349,6355.94 ; P4.29@4335.55,6412.55 cw(c4303.08,6380.08) 4349,6380.08 ; 4349,6351.11 cw(c4425.89,6351.11) P4.29@4371.52,6405.48 ; 4349,6375.26 cw(c4401.74,6375.26) P4.29@4364.45,6412.55
PG1: P4.28 U3.57 | length 822.8
  Top Layer w10: P4.28@4250,6529 4250,6498 4299.75,6448.25 4299.75,6203.75 4279,6183 U3.57@4279,5920 ; P4.28@4250.39,6526.8 ccw(c4277.17,6513.27) 4255.95,6492.05 ; P4.28@4259.31,6522.29 ccw(c4290.14,6506.71) 4265.72,6482.28 ; P4.28@4268.24,6517.78 ccw(c4303.12,6500.15) 4275.48,6472.52 ; P4.28@4277.16,6513.27 ccw(c4316.09,6493.6) 4285.25,6462.75
PG2: P4.4 U3.87 | length 1608.5
  Top Layer w10: P4.4@3050,6496.57 cw(c3050,6476.21) 3064.4,6490.6 ; P4.4@3050,6527 3050,6505 3100.5,6454.5 3100.5,6404.5 3188,6317 3280.39,6317 3334.39,6263 3376.65,6263 3612,6027.65 3612,5750 3801,5561 U3.87@3897,5561 ; P4.4@3059.77,6523.34 ccw(c3091.51,6511.43) 3067.54,6487.46 ; P4.4@3069.13,6519.82 ccw(c3107.48,6505.44) 3078.52,6476.48 ; P4.4@3078.49,6516.31 ccw(c3123.45,6499.45) 3089.5,6465.5
PG3: P4.3 U3.88 | length 1390.8
  Top Layer w10: P4.3@3050,6427 3050,6421 3174,6297 3273.52,6297 3326.52,6244 3368.78,6244 3593,6019.78 3593,5741 3793,5541 U3.88@3907,5541
PG4: P4.2 U3.89 | length 1774.8
  Top Layer w10: P4.2@2950,6527 2952,6527 3000,6479 3000,6382 3036,6346 3093.88,6346 3164.88,6275 3268.65,6275 3320.65,6223 3362.91,6223 3574,6011.91 3574,5727 3776.5,5524.5 ; P4.2@2951.25,6506.61 cw(c2953.95,6462.35) 2985.3,6493.7 ; P4.2@2951.86,6496.62 cw(c2955.76,6432.76) 3001,6478 ; P4.2@2970.43,6527 ccw(c3014.93,6527) 2983.47,6495.53 ; P4.2@2980.43,6527 ccw(c3049.08,6527) 3000.54,6478.46 ; 3776,5524 3778,5522 U3.89@3904,5522
PG5: P4.1 U3.90 | length 1518.2
  Top Layer w10: P4.1@2950,6427 2950,6404 3027,6327 3086,6327 3163,6250 3266.78,6250 3314.78,6202 3357.04,6202 3555,6004.04 3555,5718 3771,5502 U3.90@3904,5502
PG6: P3.4 U3.91 | length 1372.3
  Top Layer w10: P3.4@3038,4584 3038,4602 3169,4733 3252,4733 3596,5077 3596,5290 3788,5482 U3.91@3903,5482
PG7: P3.3 U3.92 | length 1628.5
  Top Layer w10: P3.3@3035,4486 3087,4538 ; P3.3@3037,4506.43 ccw(c3037,4550.93) 3068.47,4519.47 ; P3.3@3037,4516.43 ccw(c3037,4585.08) 3085.54,4536.54 ; P3.3@3057.41,4486.94 cw(c3103.87,4489.1) 3070.98,4521.98 ; P3.3@3067.4,4487.41 cw(c3134.48,4490.51) 3087,4538 ; U3.92@3905,5463 3797,5463 3617,5283 3617,5067 3264,4714 3188,4714 3087,4613 3087,4538
PG8: P3.6 U3.93 | length 1271.1
  Top Layer w10: P3.6@3134,4582 3134,4615 3214,4695 3272.69,4695 3637,5059.31 3637,5273 3807,5443 U3.93@3904,5443
PG9: P3.30 U3.124 | length 651.4
  Top Layer w10: U3.124@4279,5065 4279,4968.19 4129,4818.19 4129,4753.88 4224.88,4658 4267,4658 P3.30@4338,4587
PG10: P3.29 U3.125 | length 886.2
  Top Layer w10: U3.125@4299,5067 4299,4942 4464,4777 4464,4683.19 4387,4606.19 4387,4538 ; P3.29@4335,4486 4387,4538 ; P3.29@4337,4506.43 ccw(c4337,4550.93) 4368.47,4519.47 ; P3.29@4337,4516.43 ccw(c4337,4585.08) 4385.54,4536.54 ; P3.29@4357.41,4486.94 cw(c4403.87,4489.1) 4370.98,4521.98 ; P3.29@4367.4,4487.41 cw(c4434.48,4490.51) 4387,4538
PG11: P3.32 U3.126 | length 572.8
  Top Layer w10: U3.126@4318.88,5065.27 4318.88,4953.12 4495,4777 4495,4648.87 P3.32@4436,4589.87
PG12: P3.31 U3.127 | length 880
  Top Layer w10: U3.127@4338,5066 4338,4962.13 4528,4772.13 4528,4655 4487,4614 4487,4546 ; P3.31@4436,4484 4436,4495 4487,4546 ; P3.31@4437,4516.43 ccw(c4437,4565.76) 4471.88,4530.88 ; P3.31@4438,4485 P3.31@4438,4486 ; P3.31@4447.37,4487.18 cw(c4483.1,4491.24) 4457.67,4516.67 ; P3.31@4457.3,4488.31 cw(c4509.43,4494.23) 4472.33,4531.33 ; P3.31@4467.24,4489.44 cw(c4535.77,4497.23) 4487,4546
PG13: P3.34 U3.128 | length 540.8
  Top Layer w10: U3.128@4357,5031.58 4357.97,5030.61 4357.97,4969.03 4562,4765 4562,4611 P3.34@4537,4586
PG14: P3.33 U3.129 | length 830.4
  Top Layer w10: U3.129@4377,5034.69 4377,4982 4586.84,4772.16 4586.84,4532.84 ; P3.33@4537,4486 4540,4486 4586.84,4532.84 ; P3.33@4539.11,4506.32 ccw(c4543.3,4546.67) 4571.99,4517.99 ; P3.33@4540.14,4516.27 ccw(c4546.1,4573.57) 4586.84,4532.84 ; P3.33@4557.43,4486 cw(c4599.52,4486) 4569.76,4515.76 ; P3.33@4567.43,4486 cw(c4633.66,4486) 4586.83,4532.83
PG15: P3.36 U3.132 | length 754.9
  Top Layer w10: U3.132@4437,5065 4436.84,5064.84 4436.84,4952.16 4635,4754 4635,4588 P3.36@4637,4586 ; P3.36@4615.48,4607.52 ccw(c4568.36,4654.64) 4635,4654.64 ; P3.36@4622.55,4600.45 ccw(c4592.5,4630.5) 4635,4630.5 ; 4635,4640.16 ccw(c4691.16,4640.16) P3.36@4651.45,4600.45 ; 4635,4664.3 ccw(c4715.3,4664.3) P3.36@4658.52,4607.52
RXD: RT_SW.4 U2.3 | length 790.4
  Top Layer w20: RT_SW.4@2684,5280 2684,5286 2736,5338 2951,5338 3169,5556 U2.3@3271,5556 ; RT_SW.4@2686,5303.53 ccw(c2686,5341.01) 2712.51,5314.51 ; RT_SW.4@2705.53,5284 cw(c2762.33,5284) 2722.16,5324.16 ; U2.3@3221.53,5556 cw(c3221.53,5541.39) U2.3@3231.86,5551.72
TXD: RT_SW.2 U2.2 | length 894.2
  Top Layer w20: RT_SW.2@2577,5283 2661,5367 2936,5367 3172,5603 U2.2@3264.64,5603 ; RT_SW.2@2586,5303.53 ccw(c2586,5331.36) 2605.68,5311.68 ; RT_SW.2@2605.53,5284 cw(c2671.98,5284) 2624.99,5330.99
USB_VCC: K1.3 USB.1 | length 3617.6
  Top Layer w15.75: v1@2723,4901.13 ccw(c2723,4915.92) 2733.46,4905.46 ; v1@2725,4897 2758,4930 USB.1@2810,4930 ; v1@2730.13,4894 cw(c2749.74,4894) 2735.87,4907.87 ; 2741.16,4913.16 cw(c2774.62,4879.71) USB.1@2774.62,4927.02 ; 2749.19,4921.19 cw(c2766.43,4903.94) USB.1@2774.01,4927.12
  Bottom Layer w15.75: v1@2722,4894 2847,4894 2959,4782 5942,4782 K1.3@5979,4745 ; v1@2728.04,4888.96 cw(c2740.2,4876.8) 2740.2,4894 cw(c2740.2,4911.2) v1@2728.04,4899.04 ; 5943.62,4780.38 cw(c5903.24,4740) K1.3@5960.35,4740 ; 5948.45,4775.55 ccw(c5982,4809.1) K1.3@5982,4761.65
  other v1: 2723,4894
VDDA: C5.1 L1.1 L2.2 P4.48 U3.33 | length 2721.1
  Top Layer w10: U3.33@4755,5778 4812,5778 4856,5822 4856,6054.71 5136.29,6335 5188,6335 5230,6377 5270,6377 5300,6407 5300,6478 P4.48@5250,6528 ; P4.48@5250,6525 P4.48@5250,6527 ; P4.48@5250.9,6506.59 cw(c5252.88,6462) 5284.44,6493.56 ; P4.48@5251.35,6496.6 cw(c5254.24,6431.25) 5300.5,6477.5 cw(c5348.95,6525.96) P4.48@5280.43,6526.68 ; P4.48@5270.43,6526.78 ccw(c5315.66,6526.31) 5283.68,6494.32
  Bottom Layer w10: L2.2@5103.86,6320.57 ccw(c5084.23,6340.21) 5112,6340.21 ; L2.2@5112,6314 5112,6392 5100,6404 5100,6557 5120,6577 5206,6577 P4.48@5250,6533 ; 5112,6335.07 ccw(c5132.51,6335.07) L2.2@5118.01,6320.57 ; P4.48@5248,6527 5298,6477 5581,6477 5600,6458 5600,6395 5678,6317 C5.1@5727,6317 ; P4.48@5250.46,6506.57 cw(c5251.39,6465.47) 5280.46,6494.54 ; P4.48@5250.69,6496.57 cw(c5252.12,6433.12) 5297,6478 cw(c5337.89,6518.89) P4.48@5280.3,6524.2 ; P4.48@5270.35,6525.12 ccw(c5310.29,6521.44) 5281.93,6493.07 ; 5699.44,6317 cw(c5699.44,6289.44) C5.1@5718.93,6308.93 ; 5704.27,6317 ccw(c5704.27,6337.73) C5.1@5718.93,6323.07 ; C5.1@5725,6316 C5.1@5726,6315 ; C5.1@5726,6316 5728,6318 L1.1@5818,6318 ; C5.1@5730,6316 C5.1@5730,6326 ; C5.1@5733.07,6308.93 cw(c5754.97,6287.03) 5754.97,6318 ; C5.1@5733.07,6323.07 ccw(c5745.31,6335.31) 5745.31,6318 ; L1.1@5810.93,6310.93 ccw(c5793.86,6293.86) 5793.86,6318 ccw(c5793.86,6342.14) L1.1@5810.93,6325.07
VREF+: C6.1 C7.1 L2.1 P4.49 U3.32 | length 2837.4
  Top Layer w10: U3.32@4755,5758 4821,5758 4879,5816 4879,6050.84 5144.16,6316 5198,6316 5240,6358 5284,6358 P4.49@5352,6426 ; P4.49@5350,6427 P4.49@5351,6428
  Bottom Layer w10: L2.1@5111,6269 ccw(c5111,6288.31) 5124.66,6274.66 ; L2.1@5114,6258 5114,6264 5223,6373 5299,6373 P4.49@5355,6429 ; L2.1@5121,6259 cw(c5149.97,6259) 5129.49,6279.49 ; 5300.5,6374.5 ccw(c5254.02,6420.98) P4.49@5319.63,6425.1 ; 5303.17,6377.17 cw(c5350,6330.34) P4.49@5350,6396.57 ; 5316.17,6390.17 ccw(c5283.5,6422.83) P4.49@5329.61,6425.72 ; 5320.24,6394.24 cw(c5350,6364.48) P4.49@5350,6406.57 ; P4.49@5328.48,6405.48 cw(c5211.34,6288.34) C7.1@5377,6288.34 ; P4.49@5335.55,6412.55 cw(c5235.49,6312.49) C7.1@5377,6312.49 ; P4.49@5342.62,6419.62 cw(c5259.63,6336.63) 5377,6336.63 ; P4.49@5349.69,6426.69 cw(c5283.77,6360.77) 5377,6360.77 ; P4.49@5350,6427 5377,6400 C7.1@5377,6284 ; C7.1@5354.02,6314.48 ccw(c5298.54,6369.96) 5377,6369.96 ccw(c5455.46,6369.96) C7.1@5399.98,6314.48 ; P4.49@5356.76,6433.76 cw(c5307.91,6384.91) 5377,6384.91 ; C7.1@5361.09,6307.41 ccw(c5322.68,6345.82) 5377,6345.82 ccw(c5431.32,6345.82) C7.1@5392.91,6307.41 ; C7.1@5376,6274 5393,6257 C6.1@5491,6257 cw(c5491,6375.45) C7.1@5401.54,6297.8 ; C7.1@5378.89,6278.14 ccw(c5425.23,6318.36) 5425.23,6257 ; C7.1@5386.44,6284.69 ccw(c5447.15,6337.39) 5447.15,6257 ; C7.1@5393.99,6291.25 ccw(c5469.07,6356.42) 5469.07,6257 ; C6.1@5483.93,6249.93 ccw(c5466.86,6232.86) 5466.86,6257 ccw(c5466.86,6281.14) C6.1@5483.93,6264.07
VREF-: C6.2 C7.2 L4.1 P4.50 U3.31 | length 3832.3
  Top Layer w10: U3.31@4755,5739 4833,5739 4899,5805 4899,6042 5154,6297 5212,6297 5254,6339 5342,6339 5400,6397 5400,6480 P4.50@5351,6529 ; P4.50@5349,6521 P4.50@5349,6526 ; P4.50@5351.58,6506.63 cw(c5355,6462.72) 5386.14,6493.86 ; P4.50@5352.36,6496.66 cw(c5357.21,6434.22) 5401.5,6478.5 ; P4.50@5370.43,6527 ccw(c5412.52,6527) 5382.76,6497.24 ; P4.50@5380.43,6527 ccw(c5446.66,6527) 5399.83,6480.17
  Bottom Layer w10: 5168.59,6213.59 cw(c5242,6140.19) C7.2@5242,6244 ; 5185.67,6230.67 cw(c5242,6174.33) C7.2@5242,6254 ; 5193.94,6238.94 ccw(c5156.39,6276.5) C7.2@5209.5,6276.5 ; 5202.74,6247.74 cw(c5242,6208.47) C7.2@5242,6264 ; C7.2@5238,6284 C7.2@5242,6284 ; C7.2@5240,6287 C7.2@5240,6324 ; C7.2@5241,6288 C7.2@5241,6309 ; C7.2@5243,6287 5242,6287 5147,6192 4984,6192 4983,6191 4847,6191 4800,6238 4800,6558 4838.03,6596.03 5291.97,6596.03 P4.50@5356,6532 ; C7.2@5250.27,6255.58 cw(c5260.26,6230.31) C7.2@5279.48,6249.52 ; C7.2@5273.06,6274.45 cw(c5286,6270.47) 5286,6284 ; C7.2@5273.06,6293.55 ccw(c5286,6297.53) 5286,6284 ; L4.1@5276.93,6193.07 ccw(c5257.44,6212.56) 5285,6212.56 ; L4.1@5285,6186 5285,6244 5245,6284 5286,6284 ; 5285,6207.73 ccw(c5305.73,6207.73) L4.1@5291.07,6193.07 ; P4.50@5328,6528 P4.50@5352,6528 ; C6.2@5490.94,6312 5524,6312 5540,6296 5540,6247 5513,6220 5330,6220 5317,6233 5317,6253 5286,6284 ; C6.2@5498.01,6304.43 cw(c5516.29,6286.15) 5516.29,6312 ; C6.2@5498.01,6318.57 ccw(c5513.87,6334.44) 5513.87,6312
VSSA: C5.2 L3.1 L4.2 P4.51 U3.30 | length 2322.3
  Top Layer w10: U3.30@4755.89,5718.81 4840.81,5718.81 4922,5800 4922,6038 5162,6278 5221,6278 5263,6320 5350,6320 5453,6423 P4.51@5453,6431
  Bottom Layer w10: L3.1@5207,6168 cw(c5207,6151.1) L3.1@5218.95,6163.05 ; L3.1@5207,6175 5231,6151 5311,6151 5338,6178 L4.2@5338,6184 ; L3.1@5217,6178 ccw(c5248.38,6178) 5226.19,6155.81 ; 5316.08,6156.08 ccw(c5286.1,6186.06) L4.2@5328.5,6186.06 ; L4.2@5341,6184 5508,6184 5559,6235 5559,6311 5609,6261 C5.2@5724,6261 ; L4.2@5345.57,6178.99 cw(c5357.66,6166.9) 5357.66,6184 ; L4.2@5345.57,6193.14 ccw(c5367.63,6215.19) 5367.63,6184 ; P4.51@5449,6421 5558,6312 ; P4.51@5450,6396.57 cw(c5450,6339.99) 5490,6380 ; P4.51@5450,6406.57 cw(c5450,6374.14) 5472.93,6397.07 ; P4.51@5460.43,6427 ccw(c5502.52,6427) 5472.76,6397.24 ; P4.51@5470.43,6427 ccw(c5536.66,6427) 5489.83,6380.17 ; P4.51@5480.43,6427 ccw(c5570.8,6427) 5506.9,6363.1 ; 5700.71,6261 ccw(c5700.71,6286.85) C5.2@5718.99,6268.57 ; 5703.13,6261 cw(c5703.13,6238.56) C5.2@5718.99,6254.43
pads on no net: BT1. J2.17 K1.1 K1.4 K1.5 K1.6 U1.4 U2.9 U2.10 U2.11 U2.12 U2.15 U3.106 USB.4 USB.6 USB.7 USB.8 USB.9 USB.MH1 USB.MH2 X1.2 X1.3 Y1.
copper on no net: | length 33.3
  Bottom Layer w10: 4890.11,6033.15 4913.63,6009.63
  other v2: 2531,4458 6331,4468 2531,6538 6331,6538

## Keep-outs
Keep-Out Layer:
  the board outline again, w10